# Altium PCB Tigershark 3D R1.7.PcbDoc (part 3 of 4)
Units mil, origin at the board's own origin, x right, y up, seen from the top; angles counter-clockwise.
Board outline 5500 x 4600 mil, 4 copper layers (Top Layer, Groun Plane, Power Plane, Bottom Layer); 303 components, 232 nets, 993 pads, 850 vias.
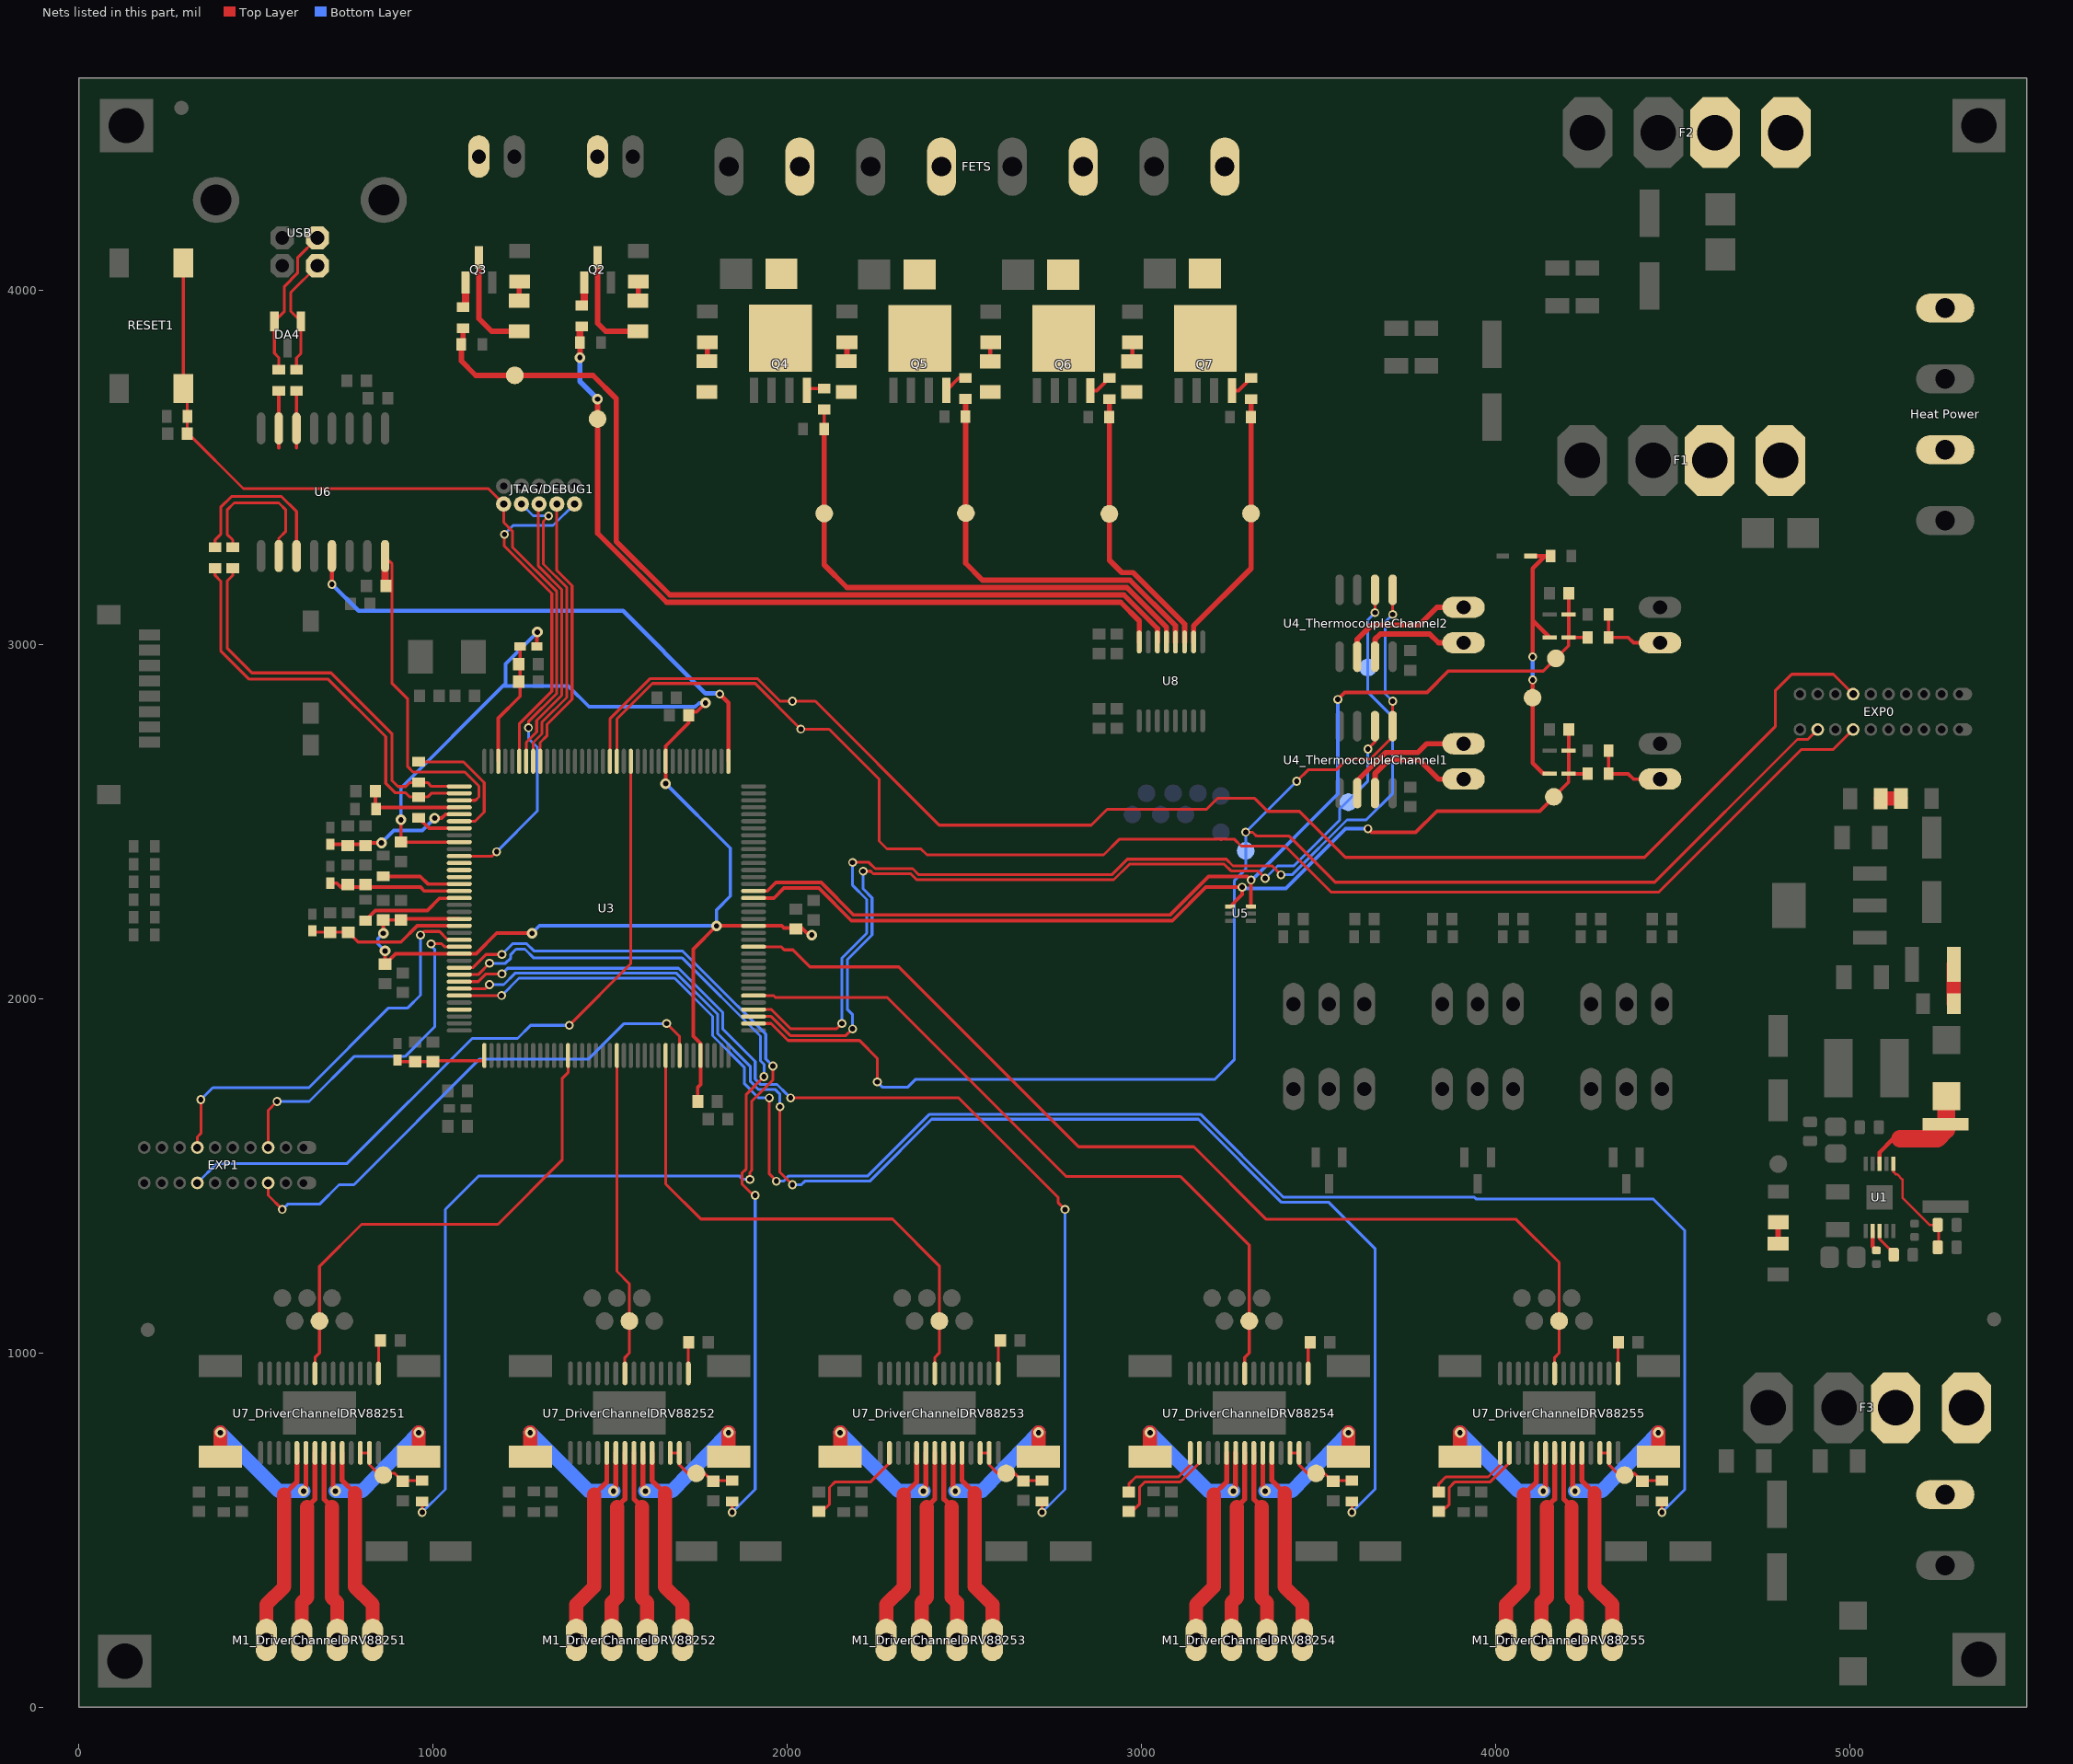
[diagram p5: the nets of this part, all layers, seen from the top]

## Via types
v1: diameter 30, hole 15, Top Layer to Bottom Layer, tented both sides, 375 vias
v2: diameter 25, hole 15, Top Layer to Bottom Layer, tented both sides, 369 vias
v3: diameter 19.68, hole 7.87, Top Layer to Bottom Layer, tented both sides, 75 vias
v4: diameter 50, hole 28, Top Layer to Bottom Layer, tented both sides, 13 vias
v5: diameter 45, hole 20, Top Layer to Bottom Layer, tented both sides, 9 vias
v6: diameter 30, hole 15, Top Layer to Bottom Layer, 9 vias

## Nets (pads, with @x,y where several pads share a name; then routed paths per layer and width w, separated by ;. In a path a pad name is that pad's centre, name@x,y a point inside that pad or via, vN(x,y) a via of type N, cw(c..) or ccw(c..) an arc to the next point about the centre after c; other vN are vias at no path point) (continued)
NetC68_DriverChannelDRV88253_2: C68_DriverChannelDRV88253.2 U7_DriverChannelDRV88253.2 | length 302.3
  Top Layer w8: C68_DriverChannelDRV88253.2@2100,552.44 2120,572.44 2120,620 2136,636 2236,636 2289.25,689.25 U7_DriverChannelDRV88253.2@2289.25,717.8
NetC68_DriverChannelDRV88254_1: C68_DriverChannelDRV88254.1 U7_DriverChannelDRV88254.1 | length 256.6
  Top Layer w8: C68_DriverChannelDRV88254.1@2975,607.56 2965,617.56 2965,630 2985,650 3105,650 3138.66,683.66 U7_DriverChannelDRV88254.1@3138.66,717.8
NetC68_DriverChannelDRV88254_2: C68_DriverChannelDRV88254.2 U7_DriverChannelDRV88254.2 | length 302.3
  Top Layer w8: C68_DriverChannelDRV88254.2@2975,552.44 2995,572.44 2995,620 3011,636 3111,636 3164.25,689.25 U7_DriverChannelDRV88254.2@3164.25,717.8
NetC68_DriverChannelDRV88255_1: C68_DriverChannelDRV88255.1 U7_DriverChannelDRV88255.1 | length 256.6
  Top Layer w8: C68_DriverChannelDRV88255.1@3850,607.56 3840,617.56 3840,630 3860,650 3980,650 4013.66,683.66 U7_DriverChannelDRV88255.1@4013.66,717.8
NetC68_DriverChannelDRV88255_2: C68_DriverChannelDRV88255.2 U7_DriverChannelDRV88255.2 | length 302.3
  Top Layer w8: C68_DriverChannelDRV88255.2@3850,552.44 3870,572.44 3870,620 3886,636 3986,636 4039.25,689.25 U7_DriverChannelDRV88255.2@4039.25,717.8
NetC71_DriverChannelDRV88251_2: C71_DriverChannelDRV88251.2 U7_DriverChannelDRV88251.15 | length 94.4
  Top Layer w8: C71_DriverChannelDRV88251.2@842.44,1035 846.34,1031.1 U7_DriverChannelDRV88251.15@846.34,942.2
NetC71_DriverChannelDRV88252_2: C71_DriverChannelDRV88252.2 U7_DriverChannelDRV88252.15 | length 94.4
  Top Layer w8: C71_DriverChannelDRV88252.2@1717.44,1035 1721.34,1031.1 U7_DriverChannelDRV88252.15@1721.34,942.2
NetC71_DriverChannelDRV88253_2: C71_DriverChannelDRV88253.2 U7_DriverChannelDRV88253.15 | length 94.4
  Top Layer w8: C71_DriverChannelDRV88253.2@2592.44,1035 2596.34,1031.1 U7_DriverChannelDRV88253.15@2596.34,942.2
NetC71_DriverChannelDRV88254_2: C71_DriverChannelDRV88254.2 U7_DriverChannelDRV88254.15 | length 94.4
  Top Layer w8: C71_DriverChannelDRV88254.2@3467.44,1035 3471.34,1031.1 U7_DriverChannelDRV88254.15@3471.34,942.2
NetC71_DriverChannelDRV88255_2: C71_DriverChannelDRV88255.2 U7_DriverChannelDRV88255.15 | length 94.4
  Top Layer w8: C71_DriverChannelDRV88255.2@4342.44,1035 4346.34,1031.1 U7_DriverChannelDRV88255.15@4346.34,942.2
NetC73_2: C73.2 R23.2 U3.40 | length 282.9
  Top Layer w10: C73.2@837.56,2586.22 837.56,2540.43 U3.40@1074.65,2540.43
NetC75_DriverChannelDRV88251_2: C75_DriverChannelDRV88251.2 R31_DriverChannelDRV88251.1 TP33_DriverChannelDRV88251.1 U7_DriverChannelDRV88251.12 U7_DriverChannelDRV88251.13 | length 226.9
  Top Layer w8: U7_DriverChannelDRV88251.12@795.16,717.8 U7_DriverChannelDRV88251.13@820.75,717.8 820.75,684.25 845,660 892.56,660 913.03,639.53 R31_DriverChannelDRV88251.1@970,639.53
NetC75_DriverChannelDRV88252_2: C75_DriverChannelDRV88252.2 R31_DriverChannelDRV88252.1 TP33_DriverChannelDRV88252.1 U7_DriverChannelDRV88252.12 U7_DriverChannelDRV88252.13 | length 226.9
  Top Layer w8: U7_DriverChannelDRV88252.12@1670.16,717.8 U7_DriverChannelDRV88252.13@1695.75,717.8 1695.75,684.25 1720,660 1767.56,660 1788.03,639.53 R31_DriverChannelDRV88252.1@1845,639.53
NetC75_DriverChannelDRV88253_2: C75_DriverChannelDRV88253.2 R31_DriverChannelDRV88253.1 TP33_DriverChannelDRV88253.1 U7_DriverChannelDRV88253.12 U7_DriverChannelDRV88253.13 | length 226.9
  Top Layer w8: U7_DriverChannelDRV88253.12@2545.16,717.8 U7_DriverChannelDRV88253.13@2570.75,717.8 2570.75,684.25 2595,660 2642.56,660 2663.03,639.53 R31_DriverChannelDRV88253.1@2720,639.53
NetC75_DriverChannelDRV88254_2: C75_DriverChannelDRV88254.2 R31_DriverChannelDRV88254.1 TP33_DriverChannelDRV88254.1 U7_DriverChannelDRV88254.12 U7_DriverChannelDRV88254.13 | length 226.9
  Top Layer w8: U7_DriverChannelDRV88254.12@3420.16,717.8 U7_DriverChannelDRV88254.13@3445.75,717.8 3445.75,684.25 3470,660 3517.56,660 3538.03,639.53 R31_DriverChannelDRV88254.1@3595,639.53
NetC75_DriverChannelDRV88255_2: C75_DriverChannelDRV88255.2 R31_DriverChannelDRV88255.1 TP33_DriverChannelDRV88255.1 U7_DriverChannelDRV88255.12 U7_DriverChannelDRV88255.13 | length 226.9
  Top Layer w8: U7_DriverChannelDRV88255.12@4295.16,717.8 U7_DriverChannelDRV88255.13@4320.75,717.8 4320.75,684.25 4345,660 4392.56,660 4413.03,639.53 R31_DriverChannelDRV88255.1@4470,639.53
NetD2_A: D2.A R9.2 U1.8 | length 326.9
  Top Layer w12: U1.8@5084.57,1533.8 5084.57,1565.67 5123.78,1604.88 5143,1604.88
  Top Layer w50: 5143,1604.88 5247.74,1604.88 R9.2@5273,1630.14 ; R9.2@5273,1645.14 D2.A@5273,1725
NetD7_2: D7.2 R8.1 | length 60
  Top Layer w15: D7.2@4798.57,1309.04 R8.1@4798.57,1369.01
NetD9_2: D9.2 R11.1 | length 56
  Top Layer w40: D9.2@5088.73,2565 R11.1@5144.69,2565
NetD10_1: D10.1 FAN-1.2 Q2.3 | length 286
  Top Layer w15: Q2.3@1465,4070 1465,3907 1487.81,3884.19 D10.1@1578.5,3884.19
NetD10_2: D10.2 R13.2 | length 54.1
  Top Layer w15: D10.2@1578.5,3970.8 1580,3972.3 R13.2@1580,4024.27
NetD11_1: D11.1 FAN-2.2 Q3.3 | length 301.3
  Top Layer w15: Q3.3@1130,4093.01 1130,3920 1165.81,3884.19 D11.1@1243.5,3884.19
NetD11_2: D11.2 R47.2 | length 73.5
  Top Layer w10: D11.2@1229.8,3957.1 D11.2@1243.5,3970.8 ; R47.2@1243.5,4022.77 R47.2@1245,4024.27
  Top Layer w15: D11.2@1243.5,3970.8 R47.2@1243.5,4022.77
NetD12_1: D12.1 D13.1 FETS.2 Q4.5
NetD13_2: D13.2 R56.1 | length 54.1
  Top Layer w8: D13.2@1773.5,3799.87 D13.2@1775,3801.36
  Top Layer w15: D13.2@1775,3801.36 R56.1@1775,3853.33
NetD14_1: D14.1 D15.1 FETS.4 Q5.5
NetD14_2: D14.2 R60.1 | length 52
  Top Layer w15: D14.2@2169,3801.36 R60.1@2169,3853.33
NetD16_1: D16.1 D17.1 FETS.6 Q6.5
NetD16_2: D16.2 R64.1 | length 52
  Top Layer w12: D16.2@2573.5,3799.44 R64.1@2573.5,3851.41
NetD18_1: D18.1 D19.1 FETS.8 Q7.5
NetD18_2: D18.2 R68.1 | length 52
  Top Layer w12: D18.2@2975,3800.94 R68.1@2975,3852.91
NetF1_1: "Heat Power.3" F1.1
NetF2_1: "Heat Power.1" F2.1
NetF3_1: "Motor Power.1" F3.1
NetF4_2: F4.2 R25.2 | length 110.7
  Top Layer w40: R25.2@5294.06,1986.25 F4.2@5294.06,2097
NetM1_DriverChannelDRV88251_1: M1_DriverChannelDRV88251.1 U7_DriverChannelDRV88251.5 | length 563.4
  Top Layer w14: 580,600 616.02,636.02 U7_DriverChannelDRV88251.5@616.02,717.8
  Top Layer w40: M1_DriverChannelDRV88251.1@530,190 530,290 580,340 580,600
NetM1_DriverChannelDRV88251_2: M1_DriverChannelDRV88251.2 U7_DriverChannelDRV88251.7 | length 543.2
  Top Layer w14: 645,565 667.2,587.2 U7_DriverChannelDRV88251.7@667.2,717.8
  Top Layer w40: M1_DriverChannelDRV88251.2@630,190 630,295 645,310 645,565
NetM1_DriverChannelDRV88251_3: M1_DriverChannelDRV88251.3 U7_DriverChannelDRV88251.8 | length 543.2
  Top Layer w14: U7_DriverChannelDRV88251.8@692.8,717.8 692.8,587.2 715,565
  Top Layer w40: 715,565 715,310 730,295 M1_DriverChannelDRV88251.3@730,190
NetM1_DriverChannelDRV88251_4: M1_DriverChannelDRV88251.4 U7_DriverChannelDRV88251.10 | length 563.4
  Top Layer w14: U7_DriverChannelDRV88251.10@743.98,717.8 743.98,640 780,603.98
  Top Layer w40: 780,603.98 780,340 830,290 M1_DriverChannelDRV88251.4@830,190
NetM1_DriverChannelDRV88252_1: M1_DriverChannelDRV88252.1 U7_DriverChannelDRV88252.5 | length 563.4
  Top Layer w14: 1455,600 1491.02,636.02 U7_DriverChannelDRV88252.5@1491.02,717.8
  Top Layer w40: M1_DriverChannelDRV88252.1@1405,190 1405,290 1455,340 1455,600
NetM1_DriverChannelDRV88252_2: M1_DriverChannelDRV88252.2 U7_DriverChannelDRV88252.7 | length 543.2
  Top Layer w14: 1520,565 1542.2,587.2 U7_DriverChannelDRV88252.7@1542.2,717.8
  Top Layer w40: M1_DriverChannelDRV88252.2@1505,190 1505,295 1520,310 1520,565
NetM1_DriverChannelDRV88252_3: M1_DriverChannelDRV88252.3 U7_DriverChannelDRV88252.8 | length 543.2
  Top Layer w14: U7_DriverChannelDRV88252.8@1567.8,717.8 1567.8,587.2 1590,565
  Top Layer w40: 1590,565 1590,310 1605,295 M1_DriverChannelDRV88252.3@1605,190
NetM1_DriverChannelDRV88252_4: M1_DriverChannelDRV88252.4 U7_DriverChannelDRV88252.10 | length 563.4
  Top Layer w14: U7_DriverChannelDRV88252.10@1618.98,717.8 1618.98,640 1655,603.98
  Top Layer w40: 1655,603.98 1655,340 1705,290 M1_DriverChannelDRV88252.4@1705,190
NetM1_DriverChannelDRV88253_1: M1_DriverChannelDRV88253.1 U7_DriverChannelDRV88253.5 | length 563.4
  Top Layer w14: 2330,600 2366.02,636.02 U7_DriverChannelDRV88253.5@2366.02,717.8
  Top Layer w40: M1_DriverChannelDRV88253.1@2280,190 2280,290 2330,340 2330,600
NetM1_DriverChannelDRV88253_2: M1_DriverChannelDRV88253.2 U7_DriverChannelDRV88253.7 | length 543.2
  Top Layer w14: 2395,565 2417.2,587.2 U7_DriverChannelDRV88253.7@2417.2,717.8
  Top Layer w40: M1_DriverChannelDRV88253.2@2380,190 2380,295 2395,310 2395,565
NetM1_DriverChannelDRV88253_3: M1_DriverChannelDRV88253.3 U7_DriverChannelDRV88253.8 | length 543.2
  Top Layer w14: U7_DriverChannelDRV88253.8@2442.8,717.8 2442.8,587.2 2465,565
  Top Layer w40: 2465,565 2465,310 2480,295 M1_DriverChannelDRV88253.3@2480,190
NetM1_DriverChannelDRV88253_4: M1_DriverChannelDRV88253.4 U7_DriverChannelDRV88253.10 | length 563.4
  Top Layer w14: U7_DriverChannelDRV88253.10@2493.98,717.8 2493.98,640 2530,603.98
  Top Layer w40: 2530,603.98 2530,340 2580,290 M1_DriverChannelDRV88253.4@2580,190
NetM1_DriverChannelDRV88254_1: M1_DriverChannelDRV88254.1 U7_DriverChannelDRV88254.5 | length 563.4
  Top Layer w14: 3205,600 3241.02,636.02 U7_DriverChannelDRV88254.5@3241.02,717.8
  Top Layer w40: M1_DriverChannelDRV88254.1@3155,190 3155,290 3205,340 3205,600
NetM1_DriverChannelDRV88254_2: M1_DriverChannelDRV88254.2 U7_DriverChannelDRV88254.7 | length 543.2
  Top Layer w14: 3270,565 3292.2,587.2 U7_DriverChannelDRV88254.7@3292.2,717.8
  Top Layer w40: M1_DriverChannelDRV88254.2@3255,190 3255,295 3270,310 3270,565
NetM1_DriverChannelDRV88254_3: M1_DriverChannelDRV88254.3 U7_DriverChannelDRV88254.8 | length 543.2
  Top Layer w14: U7_DriverChannelDRV88254.8@3317.8,717.8 3317.8,587.2 3340,565
  Top Layer w40: 3340,565 3340,310 3355,295 M1_DriverChannelDRV88254.3@3355,190
NetM1_DriverChannelDRV88254_4: M1_DriverChannelDRV88254.4 U7_DriverChannelDRV88254.10 | length 563.4
  Top Layer w14: U7_DriverChannelDRV88254.10@3368.98,717.8 3368.98,640 3405,603.98
  Top Layer w40: 3405,603.98 3405,340 3455,290 M1_DriverChannelDRV88254.4@3455,190
NetM1_DriverChannelDRV88255_1: M1_DriverChannelDRV88255.1 U7_DriverChannelDRV88255.5 | length 563.4
  Top Layer w14: 4080,600 4116.02,636.02 U7_DriverChannelDRV88255.5@4116.02,717.8
  Top Layer w40: M1_DriverChannelDRV88255.1@4030,190 4030,290 4080,340 4080,600
NetM1_DriverChannelDRV88255_2: M1_DriverChannelDRV88255.2 U7_DriverChannelDRV88255.7 | length 543.2
  Top Layer w14: 4145,565 4167.2,587.2 U7_DriverChannelDRV88255.7@4167.2,717.8
  Top Layer w40: M1_DriverChannelDRV88255.2@4130,190 4130,295 4145,310 4145,565
NetM1_DriverChannelDRV88255_3: M1_DriverChannelDRV88255.3 U7_DriverChannelDRV88255.8 | length 543.2
  Top Layer w14: U7_DriverChannelDRV88255.8@4192.8,717.8 4192.8,587.2 4215,565
  Top Layer w40: 4215,565 4215,310 4230,295 M1_DriverChannelDRV88255.3@4230,190
NetM1_DriverChannelDRV88255_4: M1_DriverChannelDRV88255.4 U7_DriverChannelDRV88255.10 | length 563.4
  Top Layer w14: U7_DriverChannelDRV88255.10@4243.98,717.8 4243.98,640 4280,603.98
  Top Layer w40: 4280,603.98 4280,340 4330,290 M1_DriverChannelDRV88255.4@4330,190
NetP2_ThermistorChannel1_1: P2_ThermistorChannel1.1 R14_ThermistorChannel1.2 R19_ThermistorChannel1.1 | length 216.7
  Top Layer w10: R19_ThermistorChannel1.1@4319.53,2700 R14_ThermistorChannel1.2@4319.53,2635 4375,2635 4390,2620 P2_ThermistorChannel1.1@4465,2620
NetP2_ThermistorChannel2_1: P2_ThermistorChannel2.1 R14_ThermistorChannel2.2 R19_ThermistorChannel2.1 | length 216.7
  Top Layer w10: R19_ThermistorChannel2.1@4319.53,3085 R14_ThermistorChannel2.2@4319.53,3020 4375,3020 4390,3005 P2_ThermistorChannel2.1@4465,3005
NetQ2_1: Q2.1 R45.2 | length 57.4
  Top Layer w20: R45.2@1427.6,3964.7 Q2.1@1427.6,4022.14
NetQ3_1: Q3.1 R52.2 | length 62.4
  Top Layer w20: R52.2@1092.6,3959.7 Q3.1@1092.6,4022.14
NetQ4_4: Q4.4 R58.2 | length 50.5
  Top Layer w10: Q4.4@2056.5,3717.66 2061.36,3722.53 R58.2@2105,3722.53
NetQ5_4: Q5.4 R62.2 | length 68.6
  Top Layer w10: Q5.4@2450,3717.28 2485.25,3752.53 R62.2@2504,3752.53
NetQ6_4: Q6.4 R66.2 | length 68.6
  Top Layer w10: Q6.4@2856,3716.85 2874.75,3716.85 R66.2@2910,3752.1
NetQ7_4: Q7.4 R70.2 | length 68.6
  Top Layer w10: Q7.4@3256,3716.85 3274.75,3716.85 R70.2@3310,3752.1
NetR4_1: R4.1 U3.51 | length 223.6
  Top Layer w10: R4.1@860,2345.47 964.53,2345.47 986.1,2323.9 U3.51@1074.65,2323.9
NetR5_2: R5.2 U3.42 | length 358.7
  Top Layer w8: R5.2@975,2669.06 1085.94,2669.06 1145,2610 1145,2526.77 1119.29,2501.06 U3.42@1074.65,2501.06
NetR6_2: R6.2 U3.53 | length 291.8
  Top Layer w10: R6.2@810,2220.47 810,2221.46 837.73,2249.19 984.19,2249.19 1018.34,2283.34 1073.46,2283.34 U3.53@1074.65,2284.53
NetR7_1: R7.1 U1.3 | length 76.4
  Top Layer w8: U1.3@5084.57,1344.83 5084.57,1321.43 5116.86,1289.14 R7.1@5116.86,1281.84
NetR10_2: R10.2 R12.1 U1.6 | length 290.4
  Top Layer w7: U1.6@5123.94,1533.8 5123.94,1511.06 5130.82,1504.18 5134.51,1504.18 5149.44,1489.25 5149.44,1438.89 5227.33,1361 R10.2@5243.85,1361 ; R12.1@5251.4,1297.36 R10.2@5251.4,1353.45
NetR17_1: R17.1 U1.2 | length 56.9
  Top Layer w12: U1.2@5064.89,1344.83 5064.89,1300.73 R17.1@5073.95,1291.68
NetR22_2: R22.2 U3.43 | length 126.7
  Top Layer w10: R22.2@960,2510.47 989.09,2481.38 U3.43@1074.65,2481.38
NetR32_DriverChannelDRV88251_2: R32_DriverChannelDRV88251.2 U7_DriverChannelDRV88251.9 | length 483.3
  Top Layer w14: U7_DriverChannelDRV88251.9@718.39,717.8 718.39,616.61 v1(725,610)
  Top Layer w40: R32_DriverChannelDRV88251.2@960,707.05 v1(960,775)
  Bottom Layer w40: v1(725,610) 800,610 v1(960,775)
NetR32_DriverChannelDRV88252_2: R32_DriverChannelDRV88252.2 U7_DriverChannelDRV88252.9 | length 483.3
  Top Layer w14: U7_DriverChannelDRV88252.9@1593.39,717.8 1593.39,616.61 v1(1600,610)
  Top Layer w40: R32_DriverChannelDRV88252.2@1835,707.05 v1(1835,775)
  Bottom Layer w40: v1(1600,610) 1675,610 v1(1835,775)
NetR32_DriverChannelDRV88253_2: R32_DriverChannelDRV88253.2 U7_DriverChannelDRV88253.9 | length 483.3
  Top Layer w14: U7_DriverChannelDRV88253.9@2468.39,717.8 2468.39,616.61 v1(2475,610)
  Top Layer w40: R32_DriverChannelDRV88253.2@2710,707.05 v1(2710,775)
  Bottom Layer w40: v1(2475,610) 2550,610 v1(2710,775)
NetR32_DriverChannelDRV88254_2: R32_DriverChannelDRV88254.2 U7_DriverChannelDRV88254.9 | length 483.3
  Top Layer w14: U7_DriverChannelDRV88254.9@3343.39,717.8 3343.39,616.61 v1(3350,610)
  Top Layer w40: R32_DriverChannelDRV88254.2@3585,707.05 v1(3585,775)
  Bottom Layer w40: v1(3350,610) 3425,610 v1(3585,775)
NetR32_DriverChannelDRV88255_2: R32_DriverChannelDRV88255.2 U7_DriverChannelDRV88255.9 | length 483.3
  Top Layer w14: U7_DriverChannelDRV88255.9@4218.39,717.8 4218.39,616.61 v1(4225,610)
  Top Layer w40: R32_DriverChannelDRV88255.2@4460,707.05 v1(4460,775)
  Bottom Layer w40: v1(4225,610) 4300,610 v1(4460,775)
NetR33_DriverChannelDRV88251_2: R33_DriverChannelDRV88251.2 U7_DriverChannelDRV88251.6 | length 481.8
  Top Layer w14: v1(635,610) 641.61,616.61 U7_DriverChannelDRV88251.6@641.61,717.8
  Top Layer w40: R33_DriverChannelDRV88251.2@400,707.05 v1(400,775)
  Bottom Layer w40: v1(400,775) 565,610 v1(635,610)
NetR33_DriverChannelDRV88252_2: R33_DriverChannelDRV88252.2 U7_DriverChannelDRV88252.6 | length 481.8
  Top Layer w14: v1(1510,610) 1516.61,616.61 U7_DriverChannelDRV88252.6@1516.61,717.8
  Top Layer w40: R33_DriverChannelDRV88252.2@1275,707.05 v1(1275,775)
  Bottom Layer w40: v1(1275,775) 1440,610 v1(1510,610)
NetR33_DriverChannelDRV88253_2: R33_DriverChannelDRV88253.2 U7_DriverChannelDRV88253.6 | length 481.8
  Top Layer w14: v1(2385,610) 2391.61,616.61 U7_DriverChannelDRV88253.6@2391.61,717.8
  Top Layer w40: R33_DriverChannelDRV88253.2@2150,707.05 v1(2150,775)
  Bottom Layer w40: v1(2150,775) 2315,610 v1(2385,610)
NetR33_DriverChannelDRV88254_2: R33_DriverChannelDRV88254.2 U7_DriverChannelDRV88254.6 | length 481.8
  Top Layer w14: v1(3260,610) 3266.61,616.61 U7_DriverChannelDRV88254.6@3266.61,717.8
  Top Layer w40: R33_DriverChannelDRV88254.2@3025,707.05 v1(3025,775)
  Bottom Layer w40: v1(3025,775) 3190,610 v1(3260,610)
NetR33_DriverChannelDRV88255_2: R33_DriverChannelDRV88255.2 U7_DriverChannelDRV88255.6 | length 481.8
  Top Layer w14: v1(4135,610) 4141.61,616.61 U7_DriverChannelDRV88255.6@4141.61,717.8
  Top Layer w40: R33_DriverChannelDRV88255.2@3900,707.05 v1(3900,775)
  Bottom Layer w40: v1(3900,775) 4065,610 v1(4135,610)
NetR45_1: R45.1 R46.1 TP41.1 U8.16 | length 2298.5
  Top Layer w8: R45.1@1415.47,3893.52 R45.1@1420,3898.05
  Top Layer w15: v1(1415,3810) v1@1415.47,3809.53 ; v1@1415.47,3810 R46.1@1415.47,3852.58 ; v1(1465,3693) 1465,3314.3 1660.3,3119 2942.21,3119 2994.43,3066.77 U8.16@2994.43,3007.22
  Top Layer w20: R46.1@1415.47,3852.58 R45.1@1415.47,3893.52
  Bottom Layer w15: v1(1415,3810) 1415,3743 v1(1465,3693)
NetR52_1: R52.1 R55.1 TP42.1 U8.14 | length 2646.5
  Top Layer w8: R55.1@1080.47,3847.58 R55.1@1085,3852.1
  Top Layer w15: R55.1@1080.47,3847.58 1080.47,3800.47 1120.95,3760 TP42.1@1231.31,3760 1452,3760 1518,3694 1518,3291 1669,3140 2950.9,3140 3045.61,3045.29 U8.14@3045.61,3007.22 ; R55.1@1085,3852.1 R52.1@1085,3893.05
NetR58_1: R58.1 R59.1 TP48.1 U8.13 | length 1519.6
  Top Layer w10: R59.1@2105,3608 R58.1@2105,3663.47
  Top Layer w15: R59.1@2105,3608 TP48.1@2105,3370 2105,3225 2169,3161 2959.6,3161 3071.2,3049.4 U8.13@3071.2,3007.22
NetR62_1: R62.1 R63.1 TP49.1 U8.12 | length 1175.7
  Top Layer w15: R62.1@2504,3693.47 2504,3230 2552,3182 2968.3,3182 3096.8,3053.51 U8.12@3096.8,3007.22
NetR66_1: R66.1 R67.1 TP50.1 U8.11 | length 792.5
  Top Layer w15: R66.1@2910,3693.05 2910,3238 2945,3203 2977,3203 3122.39,3057.61 U8.11@3122.39,3007.22
NetR70_1: R70.1 R71.1 TP51.1 U8.10 | length 752.9
  Top Layer w15: U8.10@3147.98,3007.22 3147.98,3052.98 3310,3215 R70.1@3310,3693.05
NetT2_ThermocoupleChannel1_1: T2_ThermocoupleChannel1.1 U4_ThermocoupleChannel1.3 | length 343.7
  Top Layer w15: U4_ThermocoupleChannel1.3@3660,2580.51 3660,2635.55 3698.94,2674.49 3785,2674.49 3839.49,2620 T2_ThermocoupleChannel1.1@3910,2620
NetT2_ThermocoupleChannel1_2: T2_ThermocoupleChannel1.2 U4_ThermocoupleChannel1.2 | length 378.1
  Top Layer w15: U4_ThermocoupleChannel1.2@3610,2580.51 3610,2615.25 3690.24,2695.49 3781,2695.49 3805.51,2720 T2_ThermocoupleChannel1.2@3910,2720
NetT2_ThermocoupleChannel2_1: T2_ThermocoupleChannel2.1 U4_ThermocoupleChannel2.3 | length 316.1
  Top Layer w15: U4_ThermocoupleChannel2.3@3660,2965.51 3660,3015 3675,3030 3814.49,3030 3839.49,3005 T2_ThermocoupleChannel2.1@3910,3005
NetT2_ThermocoupleChannel2_2: T2_ThermocoupleChannel2.2 U4_ThermocoupleChannel2.2 | length 386.5
  Top Layer w15: U4_ThermocoupleChannel2.2@3610,2965.51 3610,3014.49 3650.51,3055 3785,3055 3835,3105 T2_ThermocoupleChannel2.2@3910,3105
NRST: U3.69
OVREF: D1.2 D3_ThermistorChannel1.2 D3_ThermistorChannel2.2 R1.1 TP2.1 | length 769.5
  Top Layer w12: D1.2@4099.37,3250 4140,3250 4105,3215 4105,3068.43 ; v2(4105,2900) 4105,2665 4135,2635 D3_ThermistorChannel1.2@4153.43,2635 ; v2(4105,2965) 4105,3068.43 ; D3_ThermistorChannel2.2@4153.43,3020 4105,3068.43
  Bottom Layer w12: v2(4105,2900) v2(4105,2965)
R_N: DA4.1 R18.2 USB.2 | length 341.6
  Top Layer w8: R18.2@615,3775.41 615,3809.09 627.4,3821.49 DA4.1@627.4,3912.4 599,3940.8 599,3993.79 USB.2@674.21,4069
R_P: DA4.2 R20.2 USB.3 | length 428.1
  Top Layer w8: R20.2@565,3775.41 565,3810 552.6,3822.4 DA4.2@552.6,3912.4 581,3940.8 581,4011.36 618,4048.36 618,4091.79 USB.3@674.21,4148
REF1: R31_DriverChannelDRV88251.2 U3.63 | length 3260
  Top Layer w8: v2(970,550) R31_DriverChannelDRV88251.2@970,580.47 ; U3.63@1074.65,2087.68 1112.68,2087.68 1150,2125 v2(1195,2125) ; v2(1895,1490) 1895,1510 1900,1515 1900,1710 1960,1770 v2(1960,1810)
  Bottom Layer w8: v2(970,550) 1035,615 1035,1405 1130,1500 1865,1500 1875,1490 v2(1895,1490) ; v2(1195,2125) 1225,2155 1265,2155 1285,2135 1704.31,2135 1859.96,1979.35 1860.65,1979.35 1940,1900 1940,1830 v2(1960,1810)
REF2: R31_DriverChannelDRV88252.2 U3.64 | length 3226.7
  Top Layer w8: U3.64@1074.65,2067.99 1127.99,2067.99 v2(1160,2100) ; v2(1845,550) R31_DriverChannelDRV88252.2@1845,580.47 ; v2@1907.5,1442.5 1872.5,1477.5 1872.5,1507.3 1885,1519.8 1885,1730 v2(1935,1780)
  Bottom Layer w8: v2(1160,2100) 1205,2100 1220,2115 1220,2125 1235,2140 1260,2140 1285,2115 1704.51,2115 1925,1894.51 1925,1825 1935,1815 v2(1935,1780) ; v2(1845,550) 1910,615 ; 1910,1405 1910,615 ; v2(1910,1445) 1910,615
REF3: R31_DriverChannelDRV88253.2 U3.65 | length 2972.3
  Top Layer w8: U3.65@1074.65,2048.31 1128.11,2048.31 1149.8,2070 v2(1195,2070) ; v2(2010,1720) 2485,1720 2765,1440 2765,1425 v2(2785,1405) ; v2(2720,550) R31_DriverChannelDRV88253.2@2720,580.47
  Bottom Layer w8: v2(1195,2070) 1211,2086 1693.91,2086 1817.96,1961.95 1817.96,1915.22 1910,1823.18 1910,1773.18 1925.68,1757.5 1944.32,1757.5 1945.01,1758.19 1971.81,1758.19 2000,1730 ; v2(2720,550) 2785,615 v2(2785,1405)
REF4: R31_DriverChannelDRV88254.2 U3.66 | length 4066.9
  Top Layer w8: U3.66@1074.65,2028.62 1148.62,2028.62 v2(1160,2040) ; v2(1980,1695) 1980,1510 v2(2015,1475) ; v2(3595,550) R31_DriverChannelDRV88254.2@3595,580.47
  Bottom Layer w8: v2(1160,2040) 1200,2040 1232,2072 1688.11,2072 1803.96,1956.15 1803.96,1901.64 1896,1809.6 1896,1767.38 1919.88,1743.5 1950.12,1743.5 1950.81,1744.19 1965.81,1744.19 1980,1730 v2(1980,1695) ; v2(2015,1475) 2040,1475 2050,1485 2233.39,1485 2408.39,1660 3161.41,1660 3396.41,1425 3530,1425 3660,1295 3660,615 v2(3595,550)
REF5: R31_DriverChannelDRV88255.2 U3.67 | length 4969.7
  Top Layer w8: U3.67@1074.65,2008.94 v2(1193.94,2008.94) ; v2(1950,1720) 1950,1505 v2(1970,1485) ; v2(4470,550) R31_DriverChannelDRV88255.2@4470,580.47
  Bottom Layer w8: v2(1193.94,2008.94) 1243,2058 1682.32,2058 1789.96,1950.36 1789.96,1895.84 1880,1805.8 1880,1760 1920,1720 v2(1950,1720) ; v2(1970,1485) 1990,1485 2005,1500 2228.59,1500 2402.59,1674 3167.21,1674 3401.21,1440 3940.3,1440 3945.3,1435 4445,1435 4535,1345 4535,615 v2(4470,550)
REF_EXP1: EXP1.8 U3.101 | length 1499.6
  Top Layer w8: EXP1.8@535,1480 535,1445 v2(575,1405) ; v2(1660,1930) 1696.69,1893.31 U3.101@1696.69,1839.65
  Bottom Layer w8: v2(575,1405) 590,1420 680,1420 735,1475 777.2,1475 1132.2,1830 1440.2,1830 1540.2,1930 v2(1660,1930)
REF_EXP2: EXP1.13 U3.60 | length 994.2
  Top Layer w8: EXP1.13@535,1580 535,1685 v2(560,1710) ; v2(995,2155) 1025,2155 1033.27,2146.73 U3.60@1074.65,2146.73
  Bottom Layer w8: v2(560,1710) 650.6,1710 777.6,1837 921.41,1837 1005,1920.59 1005,2140 995,2150 v2(995,2155)
RESET: C63.2 JTAG/DEBUG1.10 R21.1 RESET1.1 U3.47 | length 2707.9
  Top Layer w8: RESET1.1@295.55,4077.17 RESET1.1@295.55,3722.83 306.56,3711.83 C63.2@306.56,3595 310,3595 465,3440 1157,3440 JTAG/DEBUG1.10@1200,3397 1200,3344.82 1224.5,3320.32 1224.5,3275.1 1350,3149.6 1350,2862.2 1270,2782.2 v2(1270,2765) ; U3.47@1074.65,2402.64 1167.64,2402.64 v2(1180,2415)
  Bottom Layer w8: v2(1180,2415) 1295,2530 1295,2710 1270,2735 v2(1270,2765)
RXD1: EXP0.17 U3.18 | length 4245.2
  Top Layer w8: U3.18@1499.84,2670.35 1499.84,2789.84 1614,2904 1916,2904 1980,2840 v2(2015,2840) 2079.8,2840 2429.8,2490 2858.99,2490 2903.99,2535 3184.2,2535 3214.7,2565.5 3320.52,2565.5 3357.02,2529 3446.8,2529 3576.8,2399 4420.81,2399 4790,2768.19 4790,2869.2 4836.8,2916 4954,2916 EXP0.17@5010,2860
SCLK: EXP0.2 TP6.1 U3.110 U4_ThermocoupleChannel1.5 U4_ThermocoupleChannel2.5 | length 4969.5
  Top Layer w8: U3.110@1905.35,1930.2 1954.8,1930.2 2003,1882 2204.62,1882 2255,1831.62 v2(2255,1765) ; v2(3295,2470) 3315,2470 3326,2459 3417.81,2459 3547.81,2329 4449.8,2329 4852.8,2732 4882,2732 EXP0.2@4910,2760 ; v2(3439,2614) 3471,2646 3550.8,2646 3580.8,2676 3646,2676 3710,2740 U4_ThermocoupleChannel1.5@3710,2769.49 v2(3710,2840) ; v2(3710,3085) U4_ThermocoupleChannel2.5@3710,3154.49
  Bottom Layer w8: v2(2255,1765) 2270,1750 2340,1750 2362,1772 3207,1772 3262.5,1827.5 3262.5,2332.5 3295,2365 v2(3295,2470) v2(3439,2614) ; v2(3710,2840) 3689,2861 3689,3064 v2(3710,3085)
SHDN: U3.50
SPD: U3.1 U6.13 | length 1503.1
  Top Layer w12: v2(715,3170) U6.13@715,3249.88 ; v2(1810,2860) 1834.49,2835.51 U3.1@1834.49,2670.35
  Bottom Layer w12: v2(715,3170) 790,3095 1537,3095 1770,2862 1808,2862 v2(1810,2860)
STEP1: TP40_DriverChannelDRV88251.1 U3.85 U7_DriverChannelDRV88251.22 | length 1418.9
  Top Layer w8: U7_DriverChannelDRV88251.22@667.2,942.2 667.2,987.2 680,1000 TP40_DriverChannelDRV88251.1@680,1090 680,1244.4 798.6,1363 1183.6,1363 1364.68,1544.07 1364.68,1774.28 1381.73,1791.33 U3.85@1381.73,1839.65
STEP2: TP40_DriverChannelDRV88252.1 U3.92 U7_DriverChannelDRV88252.22 | length 917.4
  Top Layer w8: U3.92@1519.53,1839.65 1519.53,1230.47 1555,1195 TP40_DriverChannelDRV88252.1@1555,1090 1555,1000 1542.2,987.2 U7_DriverChannelDRV88252.22@1542.2,942.2
STEP3: TP40_DriverChannelDRV88253.1 U3.99 U7_DriverChannelDRV88253.22 | length 1539.8
  Top Layer w8: U3.99@1657.32,1839.65 1657.32,1477.07 1756.4,1378 2297.6,1378 2430,1245.6 TP40_DriverChannelDRV88253.1@2430,1090 2430,1000 2417.2,987.2 U7_DriverChannelDRV88253.22@2417.2,942.2
STEP4: TP40_DriverChannelDRV88254.1 U3.114 U7_DriverChannelDRV88254.22 | length 2059
  Top Layer w8: U3.114@1905.35,2008.94 1962.87,2008.94 1968.56,2003.25 2283.36,2003.25 2788.61,1498 3111.4,1498 3305,1304.4 TP40_DriverChannelDRV88254.1@3305,1090 3305,1000 3292.2,987.2 U7_DriverChannelDRV88254.22@3292.2,942.2
STEP5: TP40_DriverChannelDRV88255.1 U3.121 U7_DriverChannelDRV88255.22 | length 2962.5
  Top Layer w8: U3.121@1905.35,2146.73 1983.27,2146.73 1992,2138 2016.6,2138 2064.72,2089.88 2315.52,2089.88 2823.4,1582 3148.4,1582 3353.4,1377 4058.6,1377 4180,1255.6 TP40_DriverChannelDRV88255.1@4180,1090 4180,1000 4167.2,987.2 U7_DriverChannelDRV88255.22@4167.2,942.2
STEP_EXP1: EXP1.4 U3.15 | length 2051.7
  Top Layer w8: v2(1385,1925) 1558.9,2098.9 U3.15@1558.9,2670.35
  Bottom Layer w8: EXP1.4@335,1480 390,1535 758.01,1535 1111.01,1888 1239.01,1888 1276.01,1925 v2(1385,1925)
STEP_EXP2: EXP1.17 U3.59 | length 1174.9
  Top Layer w8: EXP1.17@335,1580 335,1610 345,1620 v2(345,1715) ; v2(965,2180) 975,2190 1018.73,2190 1040.12,2168.6 1072.46,2168.6 U3.59@1074.65,2166.42
  Bottom Layer w8: v2(345,1715) 379,1749 650.01,1749 875.01,1974 929,1974 965,2010 v2(965,2180)
TC_CS1: TP4.1 U3.111 U4_ThermocoupleChannel1.6 | length 2565
  Top Layer w8: U3.111@1905.35,1949.88 1955.12,1949.88 2009,1896 2166,1896 v2(2185,1915) ; v2(2215,2360) 2236.43,2360 2243.43,2353 2349.01,2353 2366.01,2336 2922.78,2336 2966.71,2379.93 3234.46,2379.93 3253.39,2361 3329,2361 v2(3350,2340) ; v2(3640,2705) 3660,2725 U4_ThermocoupleChannel1.6@3660,2769.49
  Bottom Layer w8: v2(2185,1915) 2185,1955 2170,1970 2170,2110 2240,2180 2240,2285 2215,2310 v2(2215,2360) ; v2(3350,2340) 3385,2375 3431.21,2375 3560,2503.79 3560,2535 3640,2615 v2(3640,2705)
TC_CS2: TP5.1 U3.112 U4_ThermocoupleChannel2.6 | length 3061.9
  Top Layer w8: U3.112@1905.35,1969.57 1955.43,1969.57 2010,1915 2140,1915 v2(2155,1930) ; v2(2185,2385) 2231.23,2385 2249.23,2367 2354.81,2367 2371.81,2350 2916.98,2350 2960.91,2393.93 3240.26,2393.93 3259.19,2375 3370,2375 v2(3395,2350) ; v2(3660,3090) U4_ThermocoupleChannel2.6@3660,3154.49
  Bottom Layer w8: v2(2155,1930) 2155,2115 2225,2185 2225,2280 2185,2320 v2(2185,2385) ; v2(3395,2350) 3426.01,2350 3581.01,2505 3635,2505 3710,2580 3710,2795 3640,2865 3640,3070 v2(3660,3090)
TCK/SWDCLK: JTAG/DEBUG1.4 U3.28 | length 781.7
  Top Layer w8: U3.28@1302.99,2670.35 1302.99,2722.99 1322,2742 1322,2774 1393,2845 1393,3166 1350,3209 JTAG/DEBUG1.4@1350,3397
TDI: JTAG/DEBUG1.8 U3.29 | length 857.5
  Top Layer w8: U3.29@1283.31,2670.35 1283.31,2723.11 1308,2747.8 1308,2780.6 1378,2850.6 1378,3161.2 1312,3227.2 1312,3348 v2(1327,3363)
  Bottom Layer w8: JTAG/DEBUG1.8@1250,3397 1283.5,3363.5 1327.5,3363.5 v2(1327,3363)
TDO/SWO: JTAG/DEBUG1.6 U3.30 | length 796.4
  Top Layer w8: U3.30@1263.62,2670.35 1263.62,2723.62 1293,2753 1293,2785.4 1364,2856.4 1364,3155.4 1298,3221.4 1298,3395 JTAG/DEBUG1.6@1300,3397
THERM_AN1: C30_ThermistorChannel1.2 D3_ThermistorChannel1.1 D5_ThermistorChannel1.2 R14_ThermistorChannel1.1 TP52_ThermistorChannel1.1 U3.128 U5.4 | length 2795
  Top Layer w10: U3.128@1905.35,2284.53 1963.31,2284.53 1991.24,2312.45 2089.51,2312.45 2181.46,2220.5 3088.13,2220.5 3182.63,2315 v2(3285,2315) 3285,2294.21 U5.4@3250.47,2259.69 ; v2(3640,2480) 3650,2470 3775,2470 3835,2530 4125,2530 4206.57,2611.57 D3_ThermistorChannel1.1@4206.57,2635 R14_ThermistorChannel1.1@4260.47,2635 ; D3_ThermistorChannel1.1@4207.56,2635.98 C30_ThermistorChannel1.2@4207.56,2760
  Bottom Layer w10: v2(3285,2315) 3288.5,2311.5 3408.73,2311.5 3577.23,2480 v2(3640,2480)
THERM_AN2: C30_ThermistorChannel2.2 D3_ThermistorChannel2.1 D5_ThermistorChannel2.2 R14_ThermistorChannel2.1 TP52_ThermistorChannel2.1 U3.129 U5.3 | length 3105.6
  Top Layer w10: U3.129@1905.35,2304.21 1944.21,2304.21 1968.45,2328.45 2096.14,2328.45 2188.09,2236.5 3081.5,2236.5 3190,2345 3300,2345 v2(3310,2335) 3310,2260.16 U5.3@3309.53,2259.69 ; v2(3555,2845) 3575,2865 3807.28,2865 3867.28,2925 4135,2925 4206.57,2996.57 D3_ThermistorChannel2.1@4206.57,3020 R14_ThermistorChannel2.1@4260.47,3020 ; D3_ThermistorChannel2.1@4207.56,3020.98 C30_ThermistorChannel2.2@4207.56,3145
  Bottom Layer w10: v2(3310,2335) 3311.77,2335 3555,2578.23 v2(3555,2845)
TMS/SWDIO: JTAG/DEBUG1.2 U3.31 | length 967.7
  Top Layer w8: v2(1202,3311) 1202,3277.8 1336,3143.8 1336,2868 1243.94,2775.94 U3.31@1243.94,2670.35
  Bottom Layer w8: v2@1202,3311.46 1226.54,3336 1339,3336 JTAG/DEBUG1.2@1400,3397
TXD1: EXP0.4 U3.17 | length 4224.4
  Top Layer w8: U3.17@1519.53,2670.35 1519.53,2789.73 1619.8,2890 1910,2890 v2(2039,2761) 2119,2761 2260,2620 2260,2445 2282,2423 2378.01,2423 2395.01,2406 2893.79,2406 2937.71,2449.93 3263.45,2449.93 3282.38,2431 3406.21,2431 3536.21,2301 4461.4,2301 4864.4,2704 4954,2704 EXP0.4@5010,2760
UD_N: R18.1 U6.6 | length 161.4
  Top Layer w10: 615,3555 R18.1@615,3716.35
UD_P: R20.1 U6.7 | length 161.4
  Top Layer w10: 565,3555 R20.1@565,3716.35
UI_N: R16.2 U6.11 | length 489.4
  Top Layer w8: R16.2@385,3274.53 385,3295 401,3311 401,3387.46 431.54,3418 572.46,3418 615,3375.46 U6.11@615,3249.88
UI_P: R15.2 U6.10 | length 433.1
  Top Layer w8: R15.2@435,3274.53 435,3295 419,3311 419,3380 439,3400 565,3400 585,3380 585,3320 565,3300 U6.10@565,3249.88
UMCU_N: R16.1 R22.1 U3.38 | length 1165.9
  Top Layer w8: R16.1@385,3215.47 385,3195 401,3179 401,2982.54 481.54,2902 705,2902 867,2740 867,2608 894,2581 923.53,2581 935,2569.53 R22.1@960,2569.53 985,2569.53 995.28,2579.8 U3.38@1074.65,2579.8
UMCU_P: R5.1 R15.1 U3.37 | length 1136.3
  Top Layer w8: R15.1@435,3215.47 435,3195 419,3179 419,2990 489,2920 712.46,2920 885,2747.46 885,2615.46 901.46,2599 923.53,2599 935,2610.47 R5.1@960,2610.47 985,2610.47 995.98,2599.49 U3.37@1074.65,2599.49
VBUS: C57.2 U3.39 U6.16 | length 1011.1
  Top Layer w8: U6.16@867.56,3245 885,3227.56 885,2890 929.17,2845.83 929.17,2654.72 943.89,2640 1090,2640 1130,2600 1130,2570 1120.12,2560.12 U3.39@1074.65,2560.12
  Top Layer w20: C57.2@865,3167.56 U6.16@865,3249.88
VDDANA: C13.2 C27.2 FB6.2 U3.73 | length 247.7
  Top Layer w10: FB6.2@903.94,1822.44 C27.2@950,1822.44 C13.2@1000,1822.44 1002.56,1825 U3.73@1145,1825
  Top Layer w15: FB6.2@900,1826.38 FB6.2@903.94,1822.44
VDDBU: C28.2 C53.2 FB7.2 U3.52 | length 373.8
  Top Layer w10: FB7.2@710,2326.38 728.62,2326.38 740,2315 965,2315 975.79,2304.21 U3.52@1074.65,2304.21
VDDIN: C54.2 C55.2 FB5.2 U3.57 | length 457.1
  Top Layer w8: FB5.2@661.22,2201.38 FB5.2@665.16,2197.44 ; FB5.2@663.94,2187.44 C55.2@710,2187.44 C54.2@761.22,2187.44 788.66,2160 910,2160 ; C54.2@761.22,2197.44 C54.2@768.66,2190
  Top Layer w10: 910,2160 955.79,2205.79 U3.57@1074.65,2205.79
VDDOUT: C23.2 C36.2 C37.2 C38.2 C39.2 C41.2 C42.2 FB4.1 U3.10 U3.45 U3.56 U3.61 U3.104 U3.124 | length 4475.5
  Top Layer w10: v1(860,2185) C37.2@860,2222.44 C36.2@910,2222.44 913.03,2225.47 U3.56@1074.65,2225.47 ; v1(865,2135) C42.2@865,2097.56 894.49,2127.05 U3.61@1074.65,2127.05 1122.05,2127.05 1180,2185 v1(1280,2185) ; v1(910,2505) C41.2@910,2442.56 C41.2@910.53,2442.03 ; C41.2@910.55,2442.01 U3.45@1074.65,2442.01 ; FB4.1@1293.62,2995 1293.62,3033.62 v1(1295,3035) ; v1(1657.32,2607.32) U3.10@1657.32,2670.35 1657.32,2713.54 1722.56,2778.77 C38.2@1722.56,2800 1732.56,2810 1745,2810 v1(1770,2835) ; C23.2@1747.87,1710 1747.87,1749.8 1755.75,1757.68 U3.104@1755.75,1839.65 1755.75,1873.4 1735,1894.14 1735,2140 v1(1800.79,2205.79) U3.124@1905.35,2205.79 1985.22,2205.79 1991.01,2200 2041.86,2200 v1@2061.25,2180.61
  Bottom Layer w10: v1(860,2185) 845,2170 845,2155 v1(865,2135) ; v1(910,2505) 910,2595 1197.5,2882.5 ; v1(1280,2185) 1300.79,2205.79 v1(1800.79,2205.79) 1800.79,2250.79 1840,2290 1840,2425 v1@1657.5,2607.5 ; v1(1295,3035) 1205,2945 1205,2890 1197.5,2882.5 ; v1(1770,2835) 1751.77,2835 1740.77,2824 1441,2824 1382.5,2882.5 1197.5,2882.5
  other v1: 2070,2180
VDDPLL: C32.2 C33.2 FB4.2 U3.34 | length 350.1
  Top Layer w10: U3.34@1184.88,2670.35 1184.88,2792.12 1246.38,2853.62 FB4.2@1246.38,2995
VDDUTMI: C60.2 C61.2 FB8.2 U3.41 | length 372.5
  Top Layer w10: FB8.2@710,2436.38 C60.2@806.06,2436.38 ; C60.2@817.56,2440 v1(855,2440) ; v1(1005,2510) 1025,2510 1035.75,2520.75 U3.41@1074.65,2520.75
  Bottom Layer w10: v1@865,2450 890,2475 970,2475 v1(1005,2510)
XIN32: U3.48
XOUT32: U3.49
pads on no net: FD1.1 FD2.1 FD3.1 JTAG/DEBUG1.1@1475.59,3478.5 JTAG/DEBUG1.7 U3.2 U3.3 U3.4 U3.5 U3.6 U3.7 U3.32 U3.55 U3.127 U3.130 U3.136 U3.137 U3.138 U4_ThermocoupleChannel1.8 U4_ThermocoupleChannel2.8 U7_DriverChannelDRV88251.18 U7_DriverChannelDRV88251.19 U7_DriverChannelDRV88251.23 U7_DriverChannelDRV88251.27 U7_DriverChannelDRV88252.18 U7_DriverChannelDRV88252.19 U7_DriverChannelDRV88252.23 U7_DriverChannelDRV88252.27 U7_DriverChannelDRV88253.18 U7_DriverChannelDRV88253.19 U7_DriverChannelDRV88253.23 U7_DriverChannelDRV88253.27 U7_DriverChannelDRV88254.18 U7_DriverChannelDRV88254.19 U7_DriverChannelDRV88254.23 U7_DriverChannelDRV88254.27 U7_DriverChannelDRV88255.18 U7_DriverChannelDRV88255.19 U7_DriverChannelDRV88255.23 U7_DriverChannelDRV88255.27

## Polygon pours and split planes (outlines as drawn)
GND on Top Layer "SMPS" (solid, pour order 53): 5136,1562 5164,1534 5164,1446 5214,1396 5337,1396 5337,1521 5288,1570 5286,1572 5153,1572 5136,1572
NetC40_2 on Top Layer "SMPS" (solid, pour order 51): 5070,1576 5092.77,1598.77 5092.77,1643 5199,1749.23 5199,1765 5215,1781 5291,1781 5329,1819 5329,1905 5311,1923 5229,1923 5116,1923 5070,1877 5059,1866 5059,1594 5059,1579 5062,1576
NetD2_A on Top Layer "SMPS" (solid, pour order 48): 5103,1579 5239,1579 5288,1579 5337,1628 5337,1741 5313,1765 5224,1765 5212,1753 5212,1736 5131,1655 5104,1628 5104,1582
+12VCC2 on Top Layer "Top Layer-No Net" (solid, pour order 116): 4790,3395 4520,3395 4520,3645 4120,3645 4120,3765 3922,3765 3922,3810 3650,3810 3650,3650 3385,3650 3385,3300 4195,3300 4195,3185 4790,3185
+12VCC3 on Top Layer "Top Layer-No Net" (solid, remove dead copper, pour order 75): 4580,4090 4580,4155 4720,4155 4720,4311 4535,4311 4535,4575 3650,4575 3650,3995 4395,3995 4395,4090
GND on Top Layer "Top Layer-No Net" (solid, remove dead copper, pour order 84): 5475,3650 4128,3650 4128,3771 3931,3771 3931,3815 3655,3815 3655,3985 4400,3985 4400,4085 4585,4085 4585,4150 4725,4150 4725,3920 5110,3920 5110,3820 5475,3820
GND on Top Layer "Top Layer-No Net" (solid, remove dead copper, pour order 61): 1480,3925 1480,4060 1490,4060 1495,4060 1495,4130 1540,4130 1540,3925
GND on Top Layer "Top Layer-No Net" (solid, remove dead copper, pour order 61): 1145,3925 1145,4060 1155,4060 1160,4060 1160,4130 1205,4130 1205,3925
NetF3_1 on Top Layer "Top Layer-No Net" (solid, remove dead copper, pour order 73): 5125,500 5475,500 5475,955 5055,955 5055,735 5125,735
NetD18_1 on Top Layer "Top Layer-No Net" (solid, remove dead copper, pour order 72): 3640,4576.22 3640,3770 3385,3770 3385,3735 3340,3735 3340,3765 3080,3765 3080,3686.22 2940,3686.22 2940,3766.22 3015,3766.22 3015,3906.22 3090,3906.22 3090,3981.22 3135,3981.22 3135,4576.22
+12VCC1 on Top Layer "Top Layer-No Net" (solid, remove dead copper, pour order 82): 5045,955 4650,955 4650,750 4680,750 4680,360 4835,360 4835,285 4625,285 4625,25 4940,25 4940,205 5070,205 5070,320 5115,320 5115,655 4995,655 4995,735 5045,735
GND on Top Layer "Top Layer-No Net" (solid, remove dead copper, pour order 115): 5475,2990 5475,3390 5470,3395 5165,3395 4800,3395 4800,3250 4800,2990
NetF1_1 on Top Layer "Top Layer-No Net" (solid, remove dead copper, pour order 113): 5475,3400 5475,3645 4530,3645 4530,3494.66 4530,3422.27 4530,3400
NetF1_1 on Top Layer "Top Layer-No Net" (solid, remove dead copper, pour order 114): 5475,3400 5475,3645 4530,3645 4530,3494.66 4530,3422.27 4530,3400
+12VCC2 on Top Layer "Top Layer-No Net" (solid, remove dead copper, pour order 111): 1275,4090 1275,4455 1190,4455 1190,4140 1215,4140 1215,4090
+12VCC2 on Top Layer "Top Layer-No Net" (solid, remove dead copper, pour order 112): 1610,4090 1610,4455 1525,4455 1525,4140 1550,4140 1550,4090
+12VCC2 on Top Layer "Top Layer-No Net" (solid, remove dead copper, pour order 60): 1930,4566.64 1745,4566.64 1745,3921.64 1885,3921.64 1885,3996.64 1930,3996.64 1930,4566.64
+12VCC2 on Top Layer "Top Layer-No Net" (solid, remove dead copper, pour order 89): 2324,4566.64 2139,4566.64 2139,3921.64 2279,3921.64 2279,3996.64 2324,3996.64 2324,4566.64
+12VCC2 on Top Layer "Top Layer-No Net" (solid, remove dead copper, pour order 90): 2730,4566.22 2545,4566.22 2545,3921.22 2685,3921.22 2685,3996.22 2730,3996.22 2730,4566.22
+12VCC3 on Top Layer "Top Layer-No Net" (solid, remove dead copper, pour order 91): 3130,4566.22 2945,4566.22 2945,3921.22 3085,3921.22 3085,3996.22 3130,3996.22
NetD10_1 on Top Layer "Top Layer-No Net" (solid, remove dead copper, pour order 109): 1445,4090 1485,4090 1485,4125 1515,4155 1515,4455 1415,4455 1415,4155 1445,4125
NetD11_1 on Top Layer "Top Layer-No Net" (solid, remove dead copper, pour order 110): 1110,4090 1150,4090 1150,4130 1180,4160 1180,4455 1080,4455 1080,4160 1110,4130
GND on Top Layer "Top Layer-No Net" (solid, remove dead copper, pour order 69): 4950,200 4950,25 4955,20 5275,20 5275,225 5475,225 5475,505 5125,505 5125,315 5075,315 5075,200
NetF2_1 on Top Layer "Top Layer-No Net" (solid, remove dead copper, pour order 71): 5115,3825 5475,3825 5475,4575 4545,4575 4545,4320 4730,4320 4730,3925 5115,3925
GND on Top Layer "Top Layer-No Net" (solid, remove dead copper, pour order 80): 250,25 680,25 680,125 485,125 485,530 315,530 315,635 335,635 335,745 1025,745 1025,670 995,670 995,615 895,615 895,565 935,565 935,600 995,600 995,525 870,525 870,125 680,125 680,25 1115,25 1115,1325 870,1325 870,900 525,900 525,1325 250,1325
GND on Top Layer "Top Layer-No Net" (solid, remove dead copper, pour order 79): 1125,25 1555,25 1555,125 1360,125 1360,530 1190,530 1190,635 1210,635 1210,745 1900,745 1900,670 1870,670 1870,615 1770,615 1770,565 1810,565 1810,600 1870,600 1870,525 1745,525 1745,125 1555,125 1555,25 1990,25 1990,1325 1745,1325 1745,900 1400,900 1400,1325 1125,1325
GND on Top Layer "Top Layer-No Net" (solid, remove dead copper, pour order 78): 2000,25 2430,25 2430,125 2235,125 2235,530 2065,530 2065,635 2085,635 2085,745 2775,745 2775,670 2745,670 2745,615 2645,615 2645,565 2685,565 2685,600 2745,600 2745,525 2620,525 2620,125 2430,125 2430,25 2865,25 2865,1325 2620,1325 2620,900 2275,900 2275,1325 2000,1325
GND on Top Layer "Top Layer-No Net" (solid, remove dead copper, pour order 77): 2875,25 3305,25 3305,125 3110,125 3110,530 2940,530 2940,635 2960,635 2960,745 3650,745 3650,670 3620,670 3620,615 3520,615 3520,565 3560,565 3560,600 3620,600 3620,525 3495,525 3495,125 3305,125 3305,25 3740,25 3740,1325 3495,1325 3495,900 3150,900 3150,1325 2875,1325
GND on Top Layer "Top Layer-No Net" (solid, remove dead copper, pour order 76): 3750,25 4180,25 4180,125 3985,125 3985,530 3815,530 3815,635 3835,635 3835,745 4525,745 4525,670 4495,670 4495,615 4395,615 4395,565 4435,565 4435,600 4495,600 4495,525 4370,525 4370,125 4180,125 4180,25 4615,25 4615,1325 4370,1325 4370,900 4025,900 4025,1325 3750,1325
GND on Top Layer "Top Layer-No Net" (solid, remove dead copper, pour order 103): 1885,3758 1885,3673 1740,3673 1740,3270 2075,3270 2075,3673 2025,3673 2025,3758
GND on Top Layer "Top Layer-No Net" (solid, remove dead copper, pour order 102): 2278.5,3757.61 2278.5,3672.61 2133.5,3672.61 2133.5,3269.61 2468.5,3269.61 2468.5,3672.61 2418.5,3672.61 2418.5,3757.61
GND on Top Layer "Top Layer-No Net" (solid, remove dead copper, pour order 101): 2684.5,3757.19 2684.5,3672.19 2539.5,3672.19 2539.5,3269.19 2874.5,3269.19 2874.5,3672.19 2824.5,3672.19 2824.5,3757.19
GND on Top Layer "Top Layer-No Net" (solid, remove dead copper, pour order 100): 3084.5,3757.19 3084.5,3672.19 2939.5,3672.19 2939.5,3269.19 3274.5,3269.19 3274.5,3672.19 3224.5,3672.19 3224.5,3757.19
NetD16_1 on Top Layer "Top Layer-No Net" (solid, remove dead copper, pour order 74): 2920,4566.22 2920,3780 2875,3780 2875,3766.22 2675,3766.22 2675,3681.22 2540,3681.22 2540,3766.22 2610,3766.22 2610,3906.22 2690,3906.22 2690,3986.22 2735,3986.22 2735,4566.22
NetD14_1 on Top Layer "Top Layer-No Net" (solid, remove dead copper, pour order 81): 2514,4566.64 2514,3780 2469,3780 2469,3766.64 2269,3766.64 2269,3681.64 2134,3681.64 2134,3766.64 2204,3766.64 2204,3906.64 2284,3906.64 2284,3986.64 2329,3986.64 2329,4566.64
NetD12_1 on Top Layer "Top Layer-No Net" (solid, remove dead copper, pour order 85): 2120,4566.64 2120,3750 2084,3750 2084,3767 1875,3767 1875,3681.64 1740,3681.64 1740,3766.64 1810,3766.64 1810,3906.64 1890,3906.64 1890,3986.64 1935,3986.64 1935,4566.64
NetF3_1 on Bottom Layer "Top Layer-No Net" (solid, remove dead copper, pour order 118): 5055,955 5055,755 5125,755 5125,510 5465,510 5465,955
+12VCC1 on Bottom Layer "Top Layer-No Net" (solid, remove dead copper, pour order 117): 4625,960 5045,960 5045,25 4625,25
GND on Bottom Layer "Top Layer-No Net" (solid, remove dead copper, pour order 108): 250,1325 250,25 1115,25 1115,1325
+12VCC3 on Bottom Layer "Top Layer-No Net" (solid, remove dead copper, pour order 63): 2945,4575 2945,4000 4180,4000 4180,4575
NetF2_1 on Bottom Layer "Top Layer-No Net" (solid, remove dead copper, pour order 70): 5115,3825 5475,3825 5475,4575 4545,4575 4545,4090 4730,4090 4730,3925 5115,3925
GND on Bottom Layer "Top Layer-No Net" (solid, remove dead copper, pour order 83): 5475,3650 4125,3650 4125,3920 5110,3920 5110,3820 5475,3820
GND on Bottom Layer "Top Layer-No Net" (solid, remove dead copper, pour order 107): 1125,1325 1125,25 1990,25 1990,1325
GND on Bottom Layer "Top Layer-No Net" (solid, remove dead copper, pour order 106): 2000,1325 2000,25 2865,25 2865,1325
GND on Bottom Layer "Top Layer-No Net" (solid, remove dead copper, pour order 105): 2875,1325 2875,25 3740,25 3740,1325
GND on Bottom Layer "Top Layer-No Net" (solid, remove dead copper, pour order 104): 3750,1325 3750,25 4615,25 4615,1325
INPUT_GND on Groun Plane (split plane): 934.9,4222.11 881.4,4168.6 880.29,4166.95 879.9,4165 879.9,3901.25 879.9,3821.25 880.29,3819.3 881.4,3817.65 914.9,3784.14 914.9,3562.11 827.89,3475.1 547.11,3475.1 465.1,3557.11 465.1,3852.5 465.1,3932.5 465.1,4065 464.71,4066.95 463.6,4068.6 305.1,4227.11 305.1,4579.9 934.9,4579.9
GND on Groun Plane (split plane): 5479.9,20.1 20.1,20.1 20.1,4579.9 294.9,4579.9 294.9,4225 295.29,4223.05 296.4,4221.4 454.9,4062.89 454.9,3932.5 454.9,3852.5 454.9,3555 455.29,3553.05 456.4,3551.4 541.4,3466.4 543.05,3465.29 545,3464.9 830,3464.9 831.95,3465.29 833.6,3466.4 923.6,3556.4 924.71,3558.05 925.1,3560 925.1,3786.25 924.71,3788.2 923.6,3789.85 890.1,3823.36 890.1,3901.25 890.1,4162.89 943.6,4216.4 944.71,4218.05 945.1,4220 945.1,4579.9 5479.9,4579.9
NetF1_1 on Power Plane (split plane): 5479.9,3395.1 4530.1,3395.1 4530.1,3639.9 5479.9,3639.9
+5VCC on Power Plane (split plane): 5479.9,1195.1 5058.1,1195.1 5058.1,1371 5057.71,1372.95 5056.6,1374.6 5054.95,1375.71 5053,1376.1 4745.1,1376.1 4745.1,1931.9 5479.9,1931.9
+12VCC3 on Power Plane (split plane): 4519.9,3900.1 2935.1,3900.1 2935.1,4579.9 4519.9,4579.9
NetF2_1 on Power Plane (split plane): 5479.9,3650.1 4530.1,3650.1 4530.1,4579.9 5479.9,4579.9
NetF3_1 on Power Plane (split plane): 5479.9,500.1 5057.1,500.1 5057.1,1184.9 5479.9,1184.9
no net on Power Plane (split plane): 4285.9,766.1 4065.1,766.1 4065.1,889.9 4285.9,889.9
no net on Power Plane (split plane): 3415.9,768.1 3195.1,768.1 3195.1,889.9 3415.9,889.9
+12VCC2 on Power Plane (split plane): 2924.9,3895 2925.29,3893.05 2926.4,3891.4 2928.05,3890.29 2930,3889.9 4519.9,3889.9 4519.9,3645 4519.9,3390 4519.9,3335.1 1666.11,3335.1 1609.61,3391.6 1609.6,3391.6 1484.35,3516.85 1482.7,3517.96 1480.75,3518.35 975.1,3518.35 975.1,3772 975.1,4202 975.1,4579.9 2924.9,4579.9
3.3VCC on Power Plane (split plane): 964.9,4202 964.9,3772 964.9,3513.25 965.29,3511.3 966.4,3509.65 968.05,3508.54 970,3508.15 1478.64,3508.15 1602.4,3384.4 1602.4,3384.39 1660.4,3326.4 1662.05,3325.29 1664,3324.9 4525,3324.9 4526.95,3325.29 4528.6,3326.4 4529.71,3328.05 4530.1,3330 4530.1,3384.9 5479.9,3384.9 5479.9,1942.1 4740,1942.1 4738.05,1941.71 4736.4,1940.6 4735.29,1938.95 4734.9,1937 4734.9,1376.1 4444.71,1376.1 4444.7,1376.1 4443.73,1375.9 4442.76,1375.71 4442.75,1375.7 4441.94,1375.16 4441.11,1374.6 4441.1,1374.6 4440.55,1373.77 4440,1372.95 4440,1372.94 4439.81,1371.96 4439.62,1371 4439.62,1370.99 4440.89,900.1 2317.87,900.1 2316.95,900.71 2315,901.1 2313.05,900.71 2312.13,900.1 1668.11,900.1 1667.6,900.6 1665.95,901.71 1664,902.1 1662.05,901.71 1660.4,900.6 1660.06,900.1 20.1,900.1 20.1,4579.9 964.9,4579.9
no net on Power Plane (split plane): 1661.9,767.1 1447.1,767.1 1447.1,889.9 1661.9,889.9
+12VCC1 on Power Plane (split plane): 5047.9,1192.87 5047.29,1191.95 5046.9,1190 5046.9,495 5047.29,493.05 5048.4,491.4 5050.05,490.29 5052,489.9 5479.9,489.9 5479.9,20.1 20.1,20.1 20.1,889.9 561.9,889.9 561.9,761 562.29,759.05 563.4,757.4 564.4,756.4 566.05,755.29 568,754.9 792,754.9 793.95,755.29 795.6,756.4 796.71,758.05 797.1,760 797.1,889.9 1436.9,889.9 1436.9,762 1437.29,760.05 1438.4,758.4 1440.05,757.29 1442,756.9 1667,756.9 1668.95,757.29 1670.6,758.4 1671.71,760.05 1672.1,762 1672.1,889.9 2309.9,889.9 2309.9,758 2310.29,756.05 2311.4,754.4 2313.05,753.29 2315,752.9 2547,752.9 2548.95,753.29 2550.6,754.4 2551.71,756.05 2552.1,758 2552.1,889.9 3184.9,889.9 3184.9,763 3185.29,761.05 3186.4,759.4 3188.05,758.29 3190,757.9 3421,757.9 3422.95,758.29 3424.6,759.4 3425.71,761.05 3426.1,763 3426.1,889.9 4054.9,889.9 4054.9,761 4055.29,759.05 4056.4,757.4 4058.05,756.29 4060,755.9 4290,755.9 4291.95,756.29 4293.6,757.4 4294.6,758.4 4295.71,760.05 4296.1,762 4296.1,889.9 4446,889.9 4446.01,889.9 4446.97,890.09 4447.95,890.29 4447.96,890.29 4447.96,890.3 4448.77,890.84 4449.6,891.4 4449.61,891.4 4450.16,892.22 4450.71,893.05 4450.71,893.06 4450.72,893.06 4450.91,894.04 4451.1,895 4451.1,895.01 4449.83,1365.9 5047.9,1365.9
no net on Power Plane (split plane): 2541.9,763.1 2320.1,763.1 2320.1,889.9 2541.9,889.9
no net on Power Plane (split plane): 786.9,765.1 572.1,765.1 572.1,889.9 786.9,889.9

## Keep-outs
Keep-Out Layer:
  lines w10: 25,25 5475,25 5475,4575 25,4575 25,25

## Other copper
Groun Plane (plane layer: these items are gaps in the copper):
  lines w10: 300,4600 300,4225 460,4065 460,3932.5 460,3852.5 460,3555 545,3470 830,3470 920,3560 920,3786.25 885,3821.25 885,3901.25 885,4165 940,4220 940,4600
Power Plane (plane layer: these items are gaps in the copper):
  lines w10: 0,0 1,895 4446,895 4444.71,1371 4740,1371 ; 567,895 567,761 568,760 792,760 792,895 ; 970,4600 970,4202 970,3772 970,3513.25 1480.75,3513.25 1606,3388 1664,3330 3200,3330 3655,3330 4525,3330 4525,3390 ; 1442,895 1442,762 1667,762 1667,894 1664,897 ; 2315,896 2315,758 2547,758 2547,895 ; 2930,4600 2930,3895 3665,3895 ; 3190,895 3190,763 3421,763 3421,895 ; 3645,3895 4525,3895 ; 4060,895 4060,761 4290,761 4291,762 4291,895 ; 4525,4610 4525,3645 ; 5052,1190 5052,495 5503,495 ; 5500,1937 4740,1937 4740,1371 ; 5510,1190 5053,1190 5053,1371 4865.5,1371 4740,1371 ; 5510,3390 5140,3390 4525,3390 ; 5510,3645 4525,3645 ; 4525,3390 4525,3645